# EAGLE board FLAP_Panel (EAGLE 9.6.2)

No outline drawn. Coordinates in mm, seen from the top.
Copper layers (1*16): Top 0.035mm / dielectric 0.15mm / Bottom 0.035mm
Design rules "default": minimum track width 6mil, minimum drill 0.35mm, track to track 6mil, track to pad 6mil, pad to pad 6mil, via to via 6mil, smd to smd 6mil, copper to edge 40mil, drill to drill 6mil, minimum pad ring 10mil, minimum via ring 8mil, stop-mask expansion 4mil, vias tented up to drill 0mil, thermal gap 10mil

## Placement (x,y rotation side)
E$1  [FLAP_1_8TH]  46.99,274.32 270 top
E$2  [FLAP_1_8TH]  128.27,274.32 270 top
E$3  [FLAP_1_8TH]  209.55,274.32 270 top
E$4  [FLAP_1_8TH]  290.83,274.32 270 top
E$5  [FLAP_1_8TH]  372.11,274.32 270 top
E$6  [FLAP_1_8TH]  453.39,274.32 270 top
E$7  [FLAP_1_8TH]  534.67,274.32 270 top
E$8  [FLAP_1_8TH]  87.63,232.41 270 top
E$9  [FLAP_1_8TH]  168.91,232.41 270 top
E$10  [FLAP_1_8TH]  250.19,232.41 270 top
E$11  [FLAP_1_8TH]  331.47,232.41 270 top
E$12  [FLAP_1_8TH]  412.75,232.41 270 top
E$13  [FLAP_1_8TH]  494.03,232.41 270 top
E$15  [FLAP_1_8TH]  46.99,190.5 270 top
E$16  [FLAP_1_8TH]  128.27,190.5 270 top
E$17  [FLAP_1_8TH]  209.55,190.5 270 top
E$18  [FLAP_1_8TH]  290.83,190.5 270 top
E$19  [FLAP_1_8TH]  372.11,190.5 270 top
E$20  [FLAP_1_8TH]  453.39,190.5 270 top
E$21  [FLAP_1_8TH]  534.67,190.5 270 top
E$22  [FLAP_1_8TH]  88.9,148.59 270 top
E$23  [FLAP_1_8TH]  170.18,148.59 270 top
E$24  [FLAP_1_8TH]  251.46,148.59 270 top
E$25  [FLAP_1_8TH]  332.74,148.59 270 top
E$26  [FLAP_1_8TH]  414.02,148.59 270 top
E$27  [FLAP_1_8TH]  495.3,148.59 270 top
E$29  [FLAP_1_8TH]  48.26,106.68 270 top
E$30  [FLAP_1_8TH]  129.54,106.68 270 top
E$31  [FLAP_1_8TH]  210.82,106.68 270 top
E$32  [FLAP_1_8TH]  292.1,106.68 270 top
E$33  [FLAP_1_8TH]  373.38,106.68 270 top
E$34  [FLAP_1_8TH]  454.66,106.68 270 top
E$35  [FLAP_1_8TH]  535.94,106.68 270 top
E$36  [FLAP_1_8TH]  90.17,64.77 270 top
E$37  [FLAP_1_8TH]  171.45,64.77 270 top
E$38  [FLAP_1_8TH]  252.73,64.77 270 top
E$39  [FLAP_1_8TH]  334.01,64.77 270 top
E$40  [FLAP_1_8TH]  415.29,64.77 270 top
E$41  [FLAP_1_8TH]  496.57,64.77 270 top

## Library data of the parts
E$1-E$13 E$15-E$27 E$29-E$41 = lid